# Altium PCB mach_thu_pcb.PcbDoc
Units mm, origin at the board's own origin, x right, y up, seen from the top; angles counter-clockwise.
Board outline 152.4 x 101.6 mm, 2 copper layers (Top Layer, Bottom Layer); 27 components, 19 nets, 72 pads, 0 vias.
Unrouted connection lines stored in the file: 52.
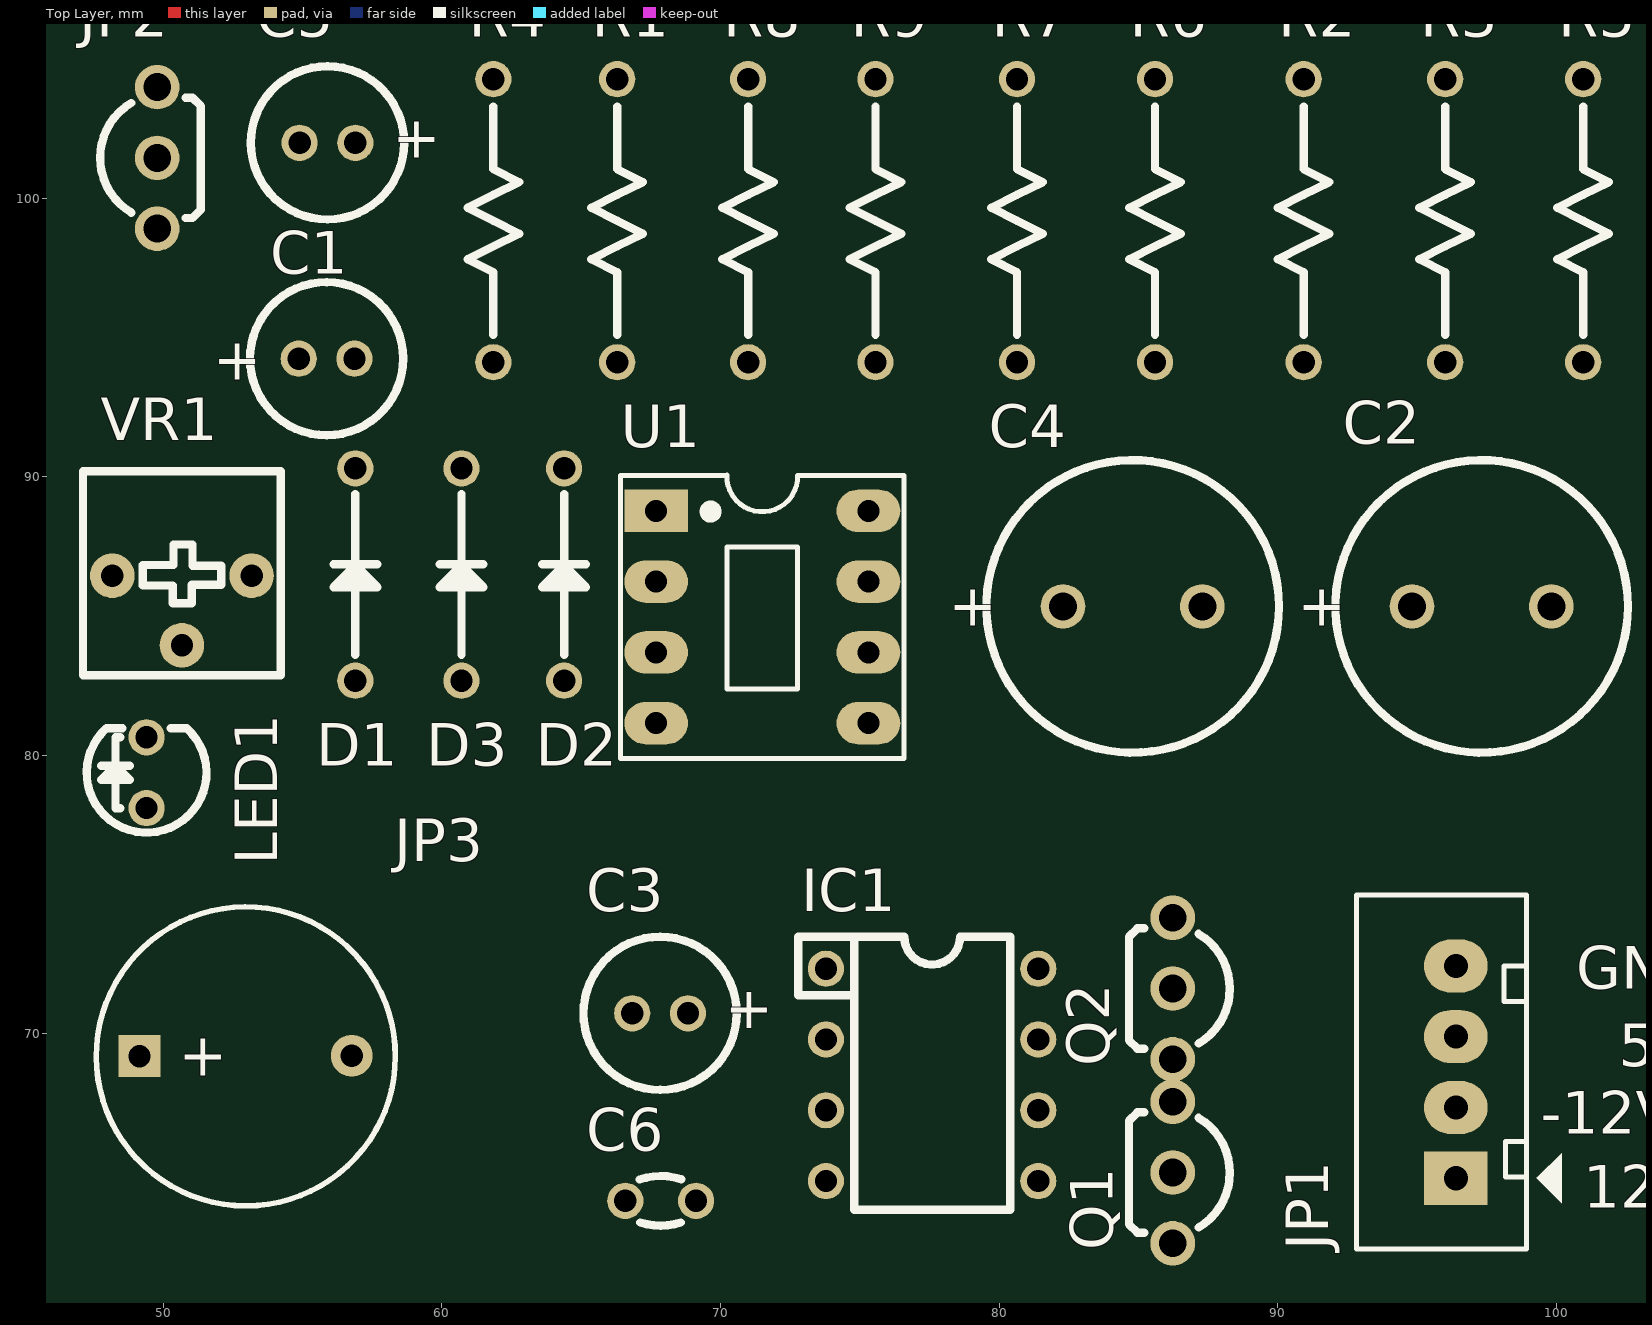
[diagram p0: Top Layer view]
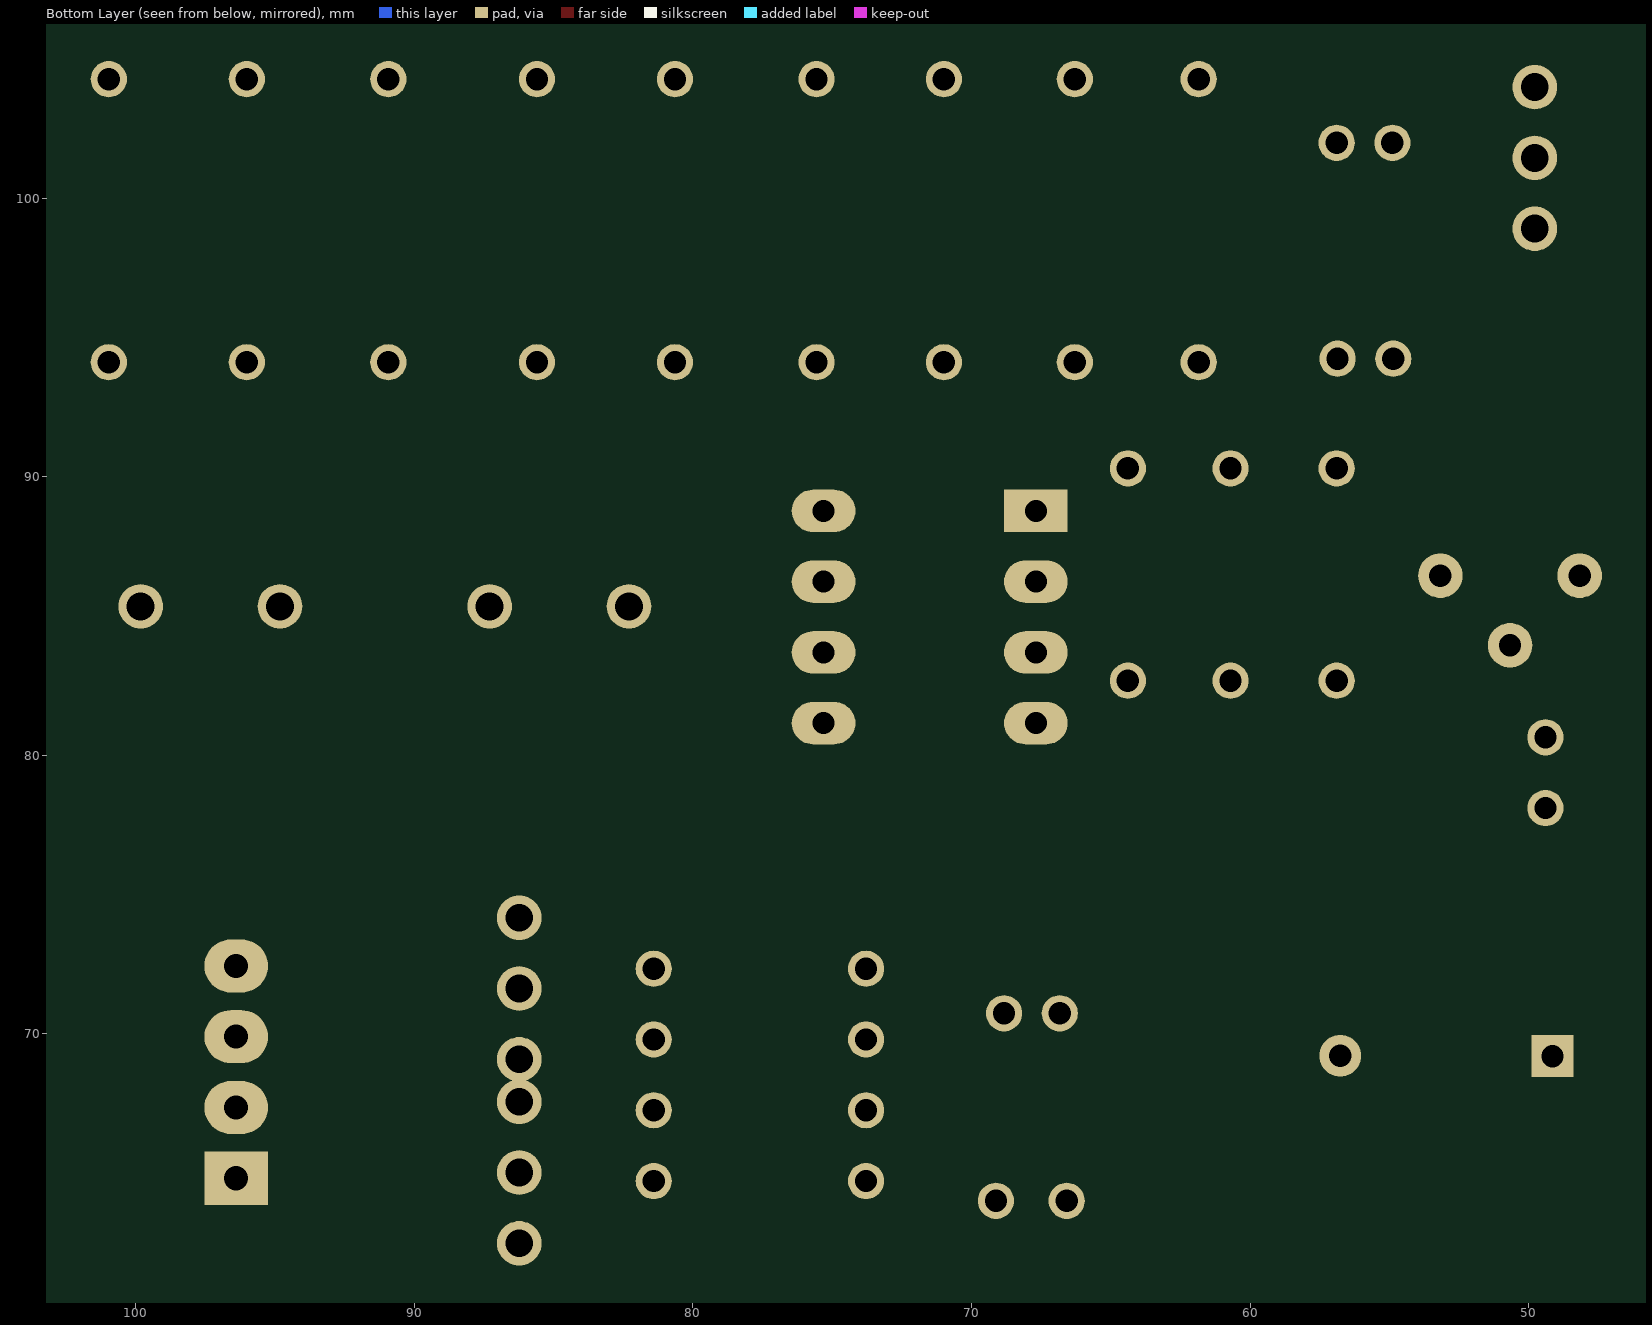
[diagram p1: Bottom Layer view, seen from below]

## Layer stack, top to bottom
Top Solder: solder mask 0.0102, Solder Resist, Dk 3.5
Top Layer: signal copper 0.0356
Dielectric 1: dielectric 0.32, FR-4, Dk 4.8
Bottom Layer: signal copper 0.0356
Bottom Solder: solder mask 0.0102, Solder Resist, Dk 3.5

## Board outline
25.4,25.4 177.8,25.4 177.8,127 25.4,127

## Design rules (kind name [scope] priority, off if disabled: settings)
Clearance [All] p1: gap=0.254 ignorepadtopadclearanceinfootprint=FALSE except(0: Arc-Hole Track-Hole SMDPad-Hole THPad-Hole Via-Hole Fill-Hole Poly-Hole Region-Hole Text-Hole)
PolygonConnect [All] p1: connectstyle=Relief reliefconductorwidth=0.254 reliefentries=4 polygonreliefangle="90 Angle" airgapwidth=0.254
RoomDefinition MACH_THU_SCH [InComponentClass('MACH_THU_SCH')] p1: confinementstyle=ConfineIn formatcopy=TRUE lockcomponents=FALSE outline 19.304,0 207.137,0 207.137,18.415 19.304,18.415
RoutingVias [All] p1: holewidth=0.711 width=1.27 viastyle="Through Hole" minholewidth=0.711 minwidth=1.27 maxholewidth=0.711 maxwidth=1.27
SolderMaskExpansion [All] p1: expansion=0.102
Width [All] p1: maxlimit=0.254 minlimit=0.254 preferedwidth=0.254
30 further rules are at their usual default settings.

## Components (designator, comment, footprint, x,y, rotation, side; value= is the part's Value field where it differs from the comment)
C1 "2.2uF" CAP_2_2UF_50V 54.864,94.234 r0 top value=10uF/50V
C2 "470uf" CAP_470UF_50V 94.822,85.344 r0 top value=100uF/35V/50V
C3 "10uF" CAP_2_2UF_50V 68.834,70.739 r180 top value=10uF/50V
C4 "470uf" CAP_470UF_50V 82.296,85.344 r0 top value=100uF/35V/50V
C5 "2.2uF" CAP_2_2UF_50V 56.896,101.981 r180 top value=10uF/50V
C6 "103" "Tu gom 104" 67.855,64.008 r180 top value=0.01uF
D1 "1N4148" 1N4148 56.896,82.677 r90 top
D2 "1N4148" 1N4148 64.389,82.677 r90 top
D3 "1N4148" 1N4148 60.706,82.677 r90 top
IC1 "LM555" LM555 73.787,72.339 r270 top
JP1 "DC" CON4 96.393,64.819 r90 top value="Connector 4"
JP2 "cam bien" SS8550 49.784,101.441 r90 top value="Connector 3"
JP3 "LOA" SPEAKER 49.149,69.202 r0 top value="Connector 2"
LED1 "LED_G_3" LED3G 49.403,78.105 r90 top value=Green
Q1 "C1815" SS8550 86.233,65.024 r270 top
Q2 "C1815" SS8050 86.233,71.628 r270 top
R1 "Res1/4W" CFR25S 66.294,94.107 r90 top value=100k
R2 "Res1/4W" CFR25S 90.932,94.107 r90 top value=10k
R3 "Res1/4W" CFR25S 96.012,104.267 r270 top value=100K
R4 "Res1/4W" CFR25S 61.849,104.267 r270 top value=1K
R5 "Res1/4W" CFR25S 100.965,94.107 r90 top value=2K2
R6 "Res1/4W" CFR25S 85.598,94.107 r90 top value=1K
R7 "Res1/4W" CFR25S 80.645,94.107 r90 top value=10k
R8 "Res1/4W" CFR25S 70.993,104.267 r270 top value=10k
R9 "Res1/4W" CFR25S 75.565,104.267 r270 top value=1K
U1 "TL082CP" DIP8 71.501,85.09 r270 top
VR1 "3306F-1-203" "VR POT 2" 50.673,86.447 r180 top value=60k

## Footprints (in the part's own frame and the unit in brackets; to place one, negate y for a bottom-side part, rotate by r counter-clockwise, add the part's x,y. Pads: shape width x height; smd on the part's side, far side on the other; paste and mask are expansions set on the pad)
1N4148 [mm] "DIODE_DIP"
  round 1.3 hole 0.8 mask+0.1: 1(0,0)
  round 1.3 hole 0.8: 2(7.62,0)
  silkscreen extent 0.93,-0.79 6.7,0.79, body extent 0.06,-1 7.56,1, height 2.5
CAP_2_2UF_50V [mm] "Capacitor, Electrolytic, Radial; Body 5 x 11 mm (Dia.xH typ); Pin Spacing 2 mm (typ)"
  round 1.3 hole 0.8: 1(0,0) 2(2,0)
  silkscreen extent -1.75,-2.75 3.75,2.75, body extent -1.53,-2.53 3.53,2.53, height 11.53
CAP_470UF_50V [mm] "Capacitor, Electrolytic, Radial; Body 10 x 20 mm (Dia.xH typ); Pin Spacing 5 mm (typ)"
  round 1.6 hole 1: 1(0,0) 2(5,0)
  silkscreen extent -2.75,-5.25 7.75,5.25, body extent -2.53,-5.03 7.53,5.03, height 16.53
CFR25S [mm] "RESISTOR_1/4W"
  round 1.3 hole 0.8: 1(0,0) 2(10.16,0)
  silkscreen extent 0.98,-0.92 9.18,0.92, body extent -0.3,-1.16 10.47,1.16, height 2.93
CON4 [mil] "CON4"
  rect 75x90 hole 34: 1(0,0)
  oval 75x90 hole 34: 2(100,0) 3(200,0) 4(300,0)
  silkscreen extent -100,-150 400,140, body extent -90,-90 398,136, height 276
DIP8 [mil] "DIP, 8-Leads, Row Spacing 7.62mm, Pitch 2.54mm, Body 9.91x6.73mm"
  rect 60x90 hole 31: 1(-145,-150)
  oval 60x90 hole 31: 2(-45,-150) 3(55,-150) 4(155,-150) 5(155,150) 6(55,150) 7(-45,150) 8(-145,150)
  silkscreen extent -195,-200 205,200, body extent -213,-153 213,153, height 177
LED3G [mm] "LED 3mm_GREEN"
  round 1.3 hole 0.8: 1(0,0) 2(2.54,0)
  silkscreen extent -0.88,-2.15 2.87,2.15, body extent -0.73,-2 2.94,2, height 4.6
LM555 [mm] "DIP 8, 8 PIN, W 7.62, Pin to pin 2.54MM"
  round 1.3 hole 0.8: 1(0,0) 2(2.54,0) 3(5.08,0) 4(7.62,0) 5(7.62,7.62) 6(5.08,7.62) 7(2.54,7.62) 8(0,7.62)
  silkscreen extent -1.15,-0.99 8.65,6.61, body extent -1.2,-0.1 8.7,7.72, height 4.57
SPEAKER [mm]
  rect 1.5x1.5 hole 0.8: 1(0,0)
  round 1.5 hole 0.8: 2(7.62,0.013)
  silkscreen extent -1.55,-5.38 9.18,5.36, body extent -2.22,-6 13.24,6, height 4.5
SS8050 [mm] "TO-92 Bent Lead, Flat Index; 3 In-Line, Axial Leads; Body Dia. 4.5mm; Leads 0.51 x 0.48 mm (max)"
  round 1.6 hole 1 mask+0.1: 1(-2.54,0) 2(0,0) 3(2.54,0)
  silkscreen extent -2.16,-1.57 2.16,2.05, body extent -2.79,-1.59 2.79,2.61, height 10
SS8550 [mm] "TO-92 Bent Lead, Flat Index; 3 In-Line, Axial Leads; Body Dia. 4.5mm; Leads 0.51 x 0.48 mm (max)"
  round 1.6 hole 1 mask+0.1: 1(-2.54,0) 2(0,0) 3(2.54,0)
  silkscreen extent -2.16,-1.57 2.16,2.05, body extent -2.79,-1.59 2.79,2.61, height 10
"Tu gom 104" [mm] "Capacitor, Radial, Tantalum, Non-Polarised; Body 3.05 x 1.78 x 3.43 mm (WxTxH max); Pin Spacing 2.54 mm (typ)"
  round 1.3 hole 0.8: 1(-1.27,0) 2(1.27,0)
  silkscreen extent -0.73,-0.89 0.76,0.89, body extent -2.92,-0.85 2.92,0.85, height 6.42
"VR POT 2" [mm] "Resistor Variable"
  round 1.6 hole 0.8 mask+0.1: 1(-2.5,0) 2(0,2.5) 3(2.5,0)
  silkscreen extent -3.55,-3.75 3.55,3.58, body extent -3.3,-3.75 3.3,3.3, height 4.7

## Part data
C1 C3 C5: library part CP1, "Cap P  0,1uF < 22uF , 16 - 50V", Description 1="10 => 220uF/6,3V/10V - 10uF => 100uF/16V", Description 2="0,1uF => 33uF/50V - 10uF => 22uF/63V", Description 3="0,47uF => 10uF/100V"
C2 C4: library part CP3, "Cap 100uF/35V - 470uF/16V", Description 1="1000uF/6,3V - 470uF/16V - 330uF - 25V", Description 2="220uF/35V - 100uF/50V - 63V - 4,7uF/200V", Description 3="22uF => 33uF100V - 3,3uF => 4,7uF/250V", Description 4="2,2uF =>3,3uF/350 - 2,2uF/400V - 1uF/450V"
C6: library part CN1.5, "Cap np 682pF => 104pF"
D1 D2 D3: "Diode HS 200mA 100V DO-35", ComponentLink1Description=Datasheet, ComponentLink1URL="D:\Dropbox\Datasheets\Diodes and Rectifiers\Diodes\1N4148.pdf", Unit Price=0.0038
IC1: "Timer"
JP1: library part Con4, "Connector 4"
JP2: library part Con3, "Connector 3"
JP3: library part Con2, "Connector 2"
LED1: library part LED_GREEN_3MM, "LED Green 3mm", ComponentLink1Description=Datasheet, ComponentLink1URL="D:\Dropbox\Datasheets\Opto and Illumination\LEDs\SMD LED.pdf", Unit Price=0.0476
Q1 Q2: "NPN 600mW, ECB", =C2383
R1 R2 R3 R4 R5 R6 R7 R8 R9: "Resistor", LatestRevisionDate=17-Jul-2002, LatestRevisionNote="Re-released for DXP Platform.", PackageDescription="Axial Device, Thru-Hole; 2 Leads; 0.3 in Pin Spacing", PackageReference=AXIAL-0.3, Published=8-Jun-2000, Publisher="Altium Limited"
U1: "JFET-Input Operational Amplifier 18V 3MHz", ComponentLink1Description=Datasheet, ComponentLink1URL="D:\Dropbox\Datasheets\Analog and Linear\Operational Amplifiers\TL082.pdf", Unit Price=0.2500
VR1: "VAR RES VR3306F 1/5W 20K", ComponentLink1Description=Datasheet, ComponentLink1URL="D:\Dropbox\Datasheets\Passive Components\Resistors\Trimming Potentiometer 3306.pdf", Unit Price=0.0476

## Nets (pads, with @x,y where several pads share a name; then routed paths per layer and width w, separated by ;. In a path a pad name is that pad's centre, name@x,y a point inside that pad or via, vN(x,y) a via of type N, cw(c..) or ccw(c..) an arc to the next point about the centre after c; other vN are vias at no path point)
5V: JP1.3 JP2.1
12V: D2.2 IC1.8 JP1.2 JP3.1 Q1.2 R2.2 R3.2 U1.8
-12V: JP1.1 U1.4
GND: C2.2 C3.2 C4.2 C5.2 C6.1 IC1.1 JP1.4 JP2.3 Q2.1 R5.1 R7.1 R8.1 R9.1 U1.3 VR1.3
NetC1_1: C1.1 JP2.2
NetC1_2: C1.2 R4.1
NetC2_1: C2.1 Q1.3 R2.1
NetC3_1: C3.1 C4.1 D3.2 IC1.2 IC1.6 IC1.7 R3.1 R7.2
NetC5_1: C5.1 D1.2 R8.2 U1.5
NetC6_2: C6.2 IC1.5
NetD1_1: D1.1 R1.2 U1.1
NetD2_1: D2.1 JP3.2 Q2.2
NetD3_1: D3.1 LED1.1 U1.7
NetIC1_3: IC1.3 R6.2
NetIC1_4: IC1.4 Q1.1 R5.2
NetLED1_2: LED1.2 R9.2
NetQ2_3: Q2.3 R6.1
NetR1_1: R1.1 R4.2 U1.2
NetU1_6: U1.6 VR1.2
pads on no net: VR1.1

## Silkscreen, mask and mechanical layers (free items; w line width, h text height)
Top Overlay:
  text "GND" at 100.711,71.628 h1.52
  text "5V" at 102.234,68.834 h1.52
  text "-12V" at 99.441,66.421 h1.52
  text "12V" at 100.965,63.754 h1.52

## Text inside footprints (layer, text, board x,y; h text height)
C1: Top Overlay "+" at 51.8,93.472 h1.5; Mechanical 1 "2" at 56.564,93.734 h1; Mechanical 1 "1" at 54.664,93.734 h1; Mechanical 1 "+" at 53.364,93.734 h1
C2: Top Overlay "+" at 90.722,84.644 h1.5; Mechanical 1 "2" at 99.522,84.744 h1.2; Mechanical 1 "1" at 94.622,84.744 h1.2; Mechanical 1 "+" at 92.622,84.644 h1.5
C3: Top Overlay "+" at 71.898,71.501 h1.5 r180; Mechanical 1 "2" at 67.134,71.239 h1 r180; Mechanical 1 "1" at 69.034,71.239 h1 r180; Mechanical 1 "+" at 70.334,71.239 h1 r180
C4: Top Overlay "+" at 78.196,84.644 h1.5; Mechanical 1 "2" at 86.996,84.744 h1.2; Mechanical 1 "1" at 82.096,84.744 h1.2; Mechanical 1 "+" at 80.096,84.644 h1.5
C5: Top Overlay "+" at 59.96,102.743 h1.5 r180; Mechanical 1 "2" at 55.196,102.481 h1 r180; Mechanical 1 "1" at 57.096,102.481 h1 r180; Mechanical 1 "+" at 58.396,102.481 h1 r180
D1: Mechanical 1 "A" at 57.196,82.477 h0.8 r90; Mechanical 1 "K" at 57.196,90.177 h0.8 r90
D2: Mechanical 1 "A" at 64.689,82.477 h0.8 r90; Mechanical 1 "K" at 64.689,90.177 h0.8 r90
D3: Mechanical 1 "A" at 61.006,82.477 h0.8 r90; Mechanical 1 "K" at 61.006,90.177 h0.8 r90
IC1: Mechanical 1 "1" at 74.697,72.589 h1 r270; Mechanical 1 "4" at 74.697,65.089 h1 r270; Mechanical 1 "5" at 79.597,65.089 h1 r270; Mechanical 1 "8" at 79.597,72.689 h1 r270
JP2: Mechanical 1 "E" at 50.165,98.647 h0.8 r90; Mechanical 1 "B" at 50.165,101.187 h0.8 r90; Mechanical 1 "C" at 50.165,103.727 h0.8 r90
JP3: Top Overlay "+" at 50.559,68.491 h1.52
Q1: Mechanical 1 "E" at 85.852,67.818 h0.8 r270; Mechanical 1 "B" at 85.852,65.278 h0.8 r270; Mechanical 1 "C" at 85.852,62.738 h0.8 r270
Q2: Mechanical 1 "C" at 85.852,69.342 h0.8 r270; Mechanical 1 "B" at 85.852,71.882 h0.8 r270; Mechanical 1 "E" at 85.852,74.422 h0.8 r270
VR1: Mechanical 2 "1" at 53.293,86.797 h0.8 r180; Mechanical 2 "3" at 48.423,86.797 h0.8 r180; Mechanical 2 "2" at 50.933,84.337 h0.8 r180